# Altium PCB SX1308.PcbDoc
Units mil, origin at the board's own origin, x right, y up, seen from the top; angles counter-clockwise.
Board outline 685 x 570 mil, 2 copper layers (Top Layer, Bottom Layer); 13 components, 7 nets, 30 pads, 24 vias.
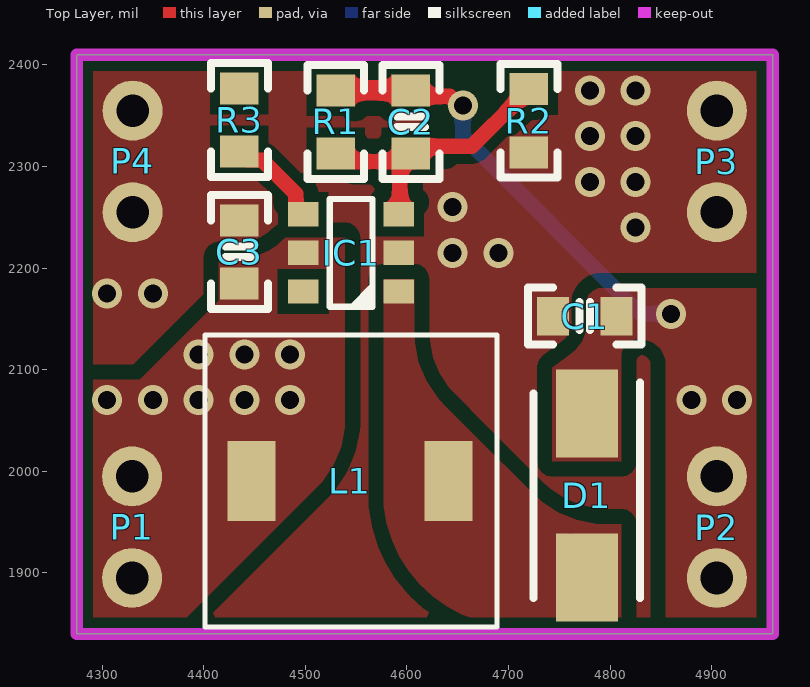
[diagram p0: Top Layer view]
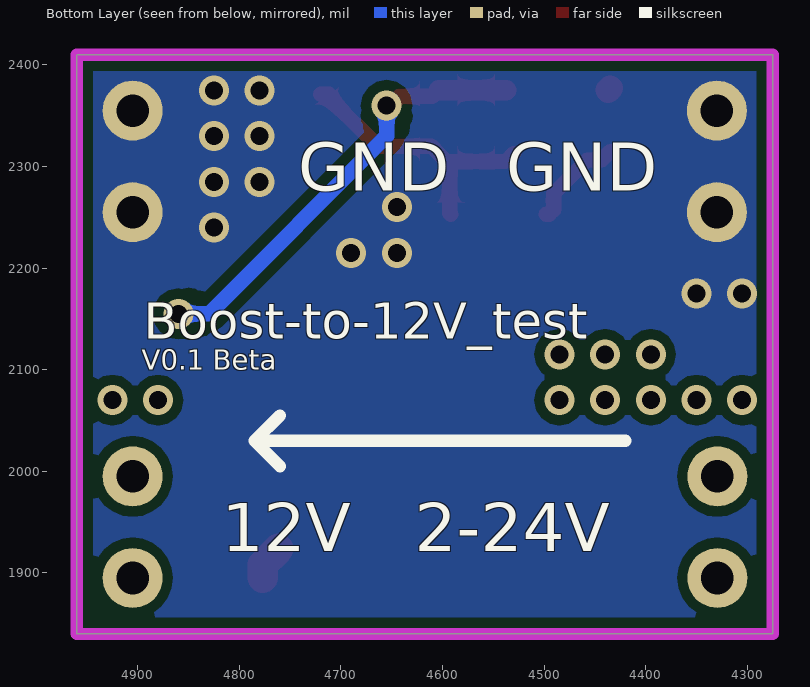
[diagram p1: Bottom Layer view, seen from below]
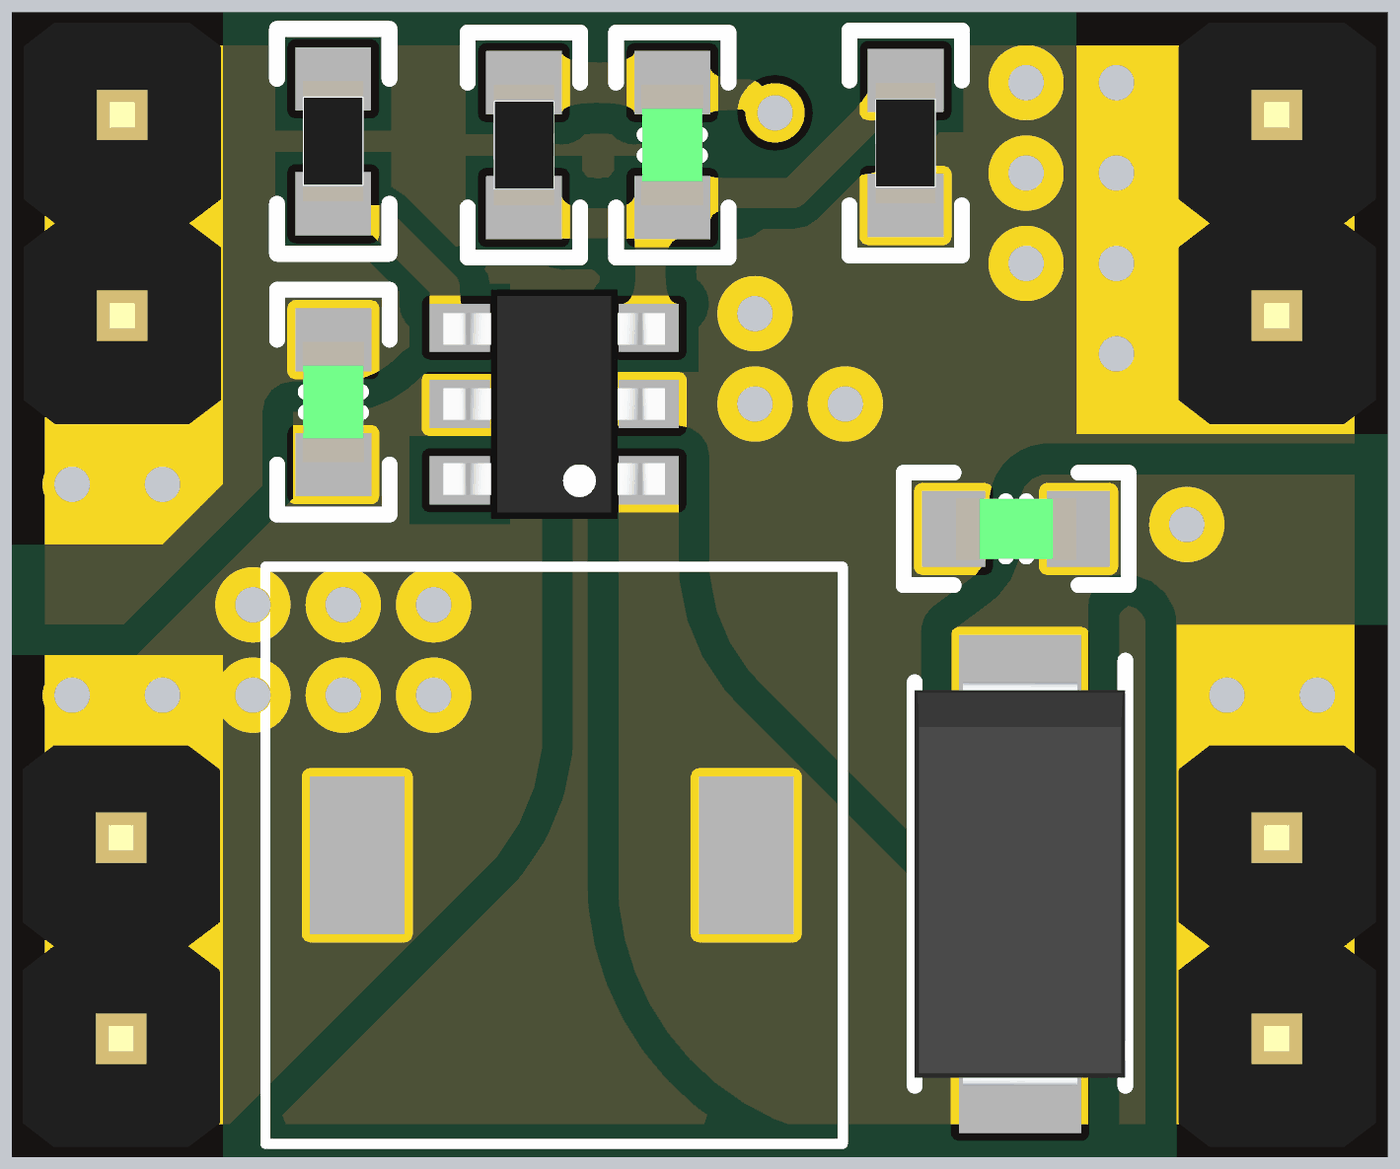
[diagram p2: 3D render of the assembled board from above, using the file's embedded part models]

## Layer stack, top to bottom
Top Solder: solder mask 0.4, Solder Resist, Dk 3.5
Top Layer: signal copper 1.4
Dielectric 1: dielectric 12.6, FR-4, Dk 4.8
Bottom Layer: signal copper 1.4
Bottom Solder: solder mask 0.4, Solder Resist, Dk 3.5

## Board outline
4275,1840 4960,1840 4960,2410 4275,2410

## Design rules (kind name [scope] priority, off if disabled: settings)
Clearance [All] p1: gap=10 ignorepadtopadclearanceinfootprint=FALSE except(15: Fill-Fill Fill-Poly Fill-Region Poly-Poly Poly-Region Region-Region)
PlaneConnect [All] p1: planeconnectstyle=Direct reliefexpansion=20 reliefentries=4 reliefconductorwidth=10 reliefairgap=10
PolygonConnect [All] p1: connectstyle=Direct reliefconductorwidth=10 reliefentries=4 polygonreliefangle="90 Angle" airgapwidth=10
RoutingVias [All] p1: holewidth=17.72 width=29.53 viastyle="Through Hole" minholewidth=17.72 minwidth=29.53 maxholewidth=17.72 maxwidth=29.53
SolderMaskExpansion [All] p1: expansion=4 istentingtop=FALSE
Width [All] p1: maxlimit=100 minlimit=15 preferedwidth=15
29 further rules are at their usual default settings.

## Components (designator, comment, footprint, x,y, rotation, side; value= is the part's Value field where it differs from the comment)
C1 "22uF/25V" CAP-0603 4775,2152.79 r0 top
C2 "15pF/50V" CAP-0603 4603.83,2343.95 r90 top
C3 "22uF/25V" CAP-0603 4435.05,2215.94 r270 top
D1 "SS34" DO-214AC_SMA 4777,1976 r270 top
IC1 "SX1308" SOT-23-6 4545,2215 r0 top locked
L1 "4.7uH/4A" SMD_7.3x7.3x4.2mm 4526.5,1975.71 r0 top
P1 "HDR1x2_2.54" HDR1X2_2.54_180 4329.46,1995 r0 top
P2 "HDR1x2_2.54" HDR1X2_2.54_180 4905,1995 r0 top
P3 "HDR1x2_2.54" HDR1X2_2.54_180 4905,2355 r0 top
P4 "HDR1x2_2.54" HDR1X2_2.54_180 4330,2355 r0 top
R1 "191k" R-0603 4529.95,2343.95 r90 top
R2 "10k" R-0603 4720,2345 r90 top
R3 "100k" R-0603 4435,2345.82 r270 top

## Footprints (in the part's own frame and the unit in brackets; to place one, negate y for a bottom-side part, rotate by r counter-clockwise, add the part's x,y. Pads: shape width x height; smd on the part's side, far side on the other; paste and mask are expansions set on the pad)
CAP-0603 [mm]
  rect 0.8x0.96 smd: 1(-0.79,0) 2(0.79,0)
  silkscreen extent -1.42,-0.71 1.42,0.71, body extent -0.76,-0.39 0.76,0.39, height 0.9
DO-214AC_SMA [mm]
  rect 2.2x1.55 smd: 1(2.05,0) 2(-2.05,0)
  silkscreen extent -2.83,-1.33 2.55,1.33, body extent -2.55,-1.33 2.55,1.33, height 2.29
HDR1X2_2.54_180 [mm]
  round 1.5 hole 0.813: 1(0,0) 2(0,-2.54)
  body extent -1.25,-3.81 1.25,1.27, height 8.2
R-0603 [mm]
  rect 0.8x0.96 smd: 1(-0.79,0) 2(0.79,0)
  silkscreen extent -1.42,-0.71 1.42,0.71, body extent -0.76,-0.38 0.76,0.38, height 0.41
SMD_7.3x7.3x4.2mm [mm]
  rect 1.2x2 smd: 1(-2.02,0.37) 2(2.9,0.37)
  silkscreen extent -3.18,-3.28 4.12,4.02, body extent -3.18,-3.28 4.1,4, height 3
SOT-23-6 [mil]
  rect 30x24 smd: 1(47,-38) 2(47,0) 3(47,38) 4(-47,38) 5(-47,0) 6(-47,-38)
  silkscreen extent -21,-53 21,53, body extent -55,-57 55,57, height 57

## Part data
C1 C3: library part CAP, "X7R", Package=0402, SuppliersPartNumber=C52923, ComponentLink1Description=供应商链接, ComponentLink1URL=http://www.szlcsc.com/product/details_53938.html, Supplier=LC
C2: library part CAP, "NPO", Package=0402, SuppliersPartNumber=C52923, ComponentLink1Description=供应商链接, ComponentLink1URL=http://www.szlcsc.com/product/details_53938.html, Supplier=LC
D1: library part DIODE, "肖特基二极管", Package=SMA(DO-214AC), SuppliersPartNumber=C22452, ComponentLink1Description=供应商链接, ComponentLink1URL=http://www.szlcsc.com/product/details_23178.html, Supplier=LC
IC1: "集成升压芯片", Manufacturer_Name="Shenzhen Suosemi Tech", Datasheet Link=https://datasheet.lcsc.com/szlcsc/Shenzhen-Suosemi-Tech-SX1308_C78162.pdf, Height=1.45mm, Manufacturer_Part_Number=SX1308
L1: library part INDUCTOR, "电感", Package=0402, SuppliersPartNumber=C32041, ComponentLink1Description=供应商链接, ComponentLink1URL=http://www.szlcsc.com/product/details_33003.html, Supplier=LC
P1 P2 P3 P4: "Header"
R1 R2 R3: library part RES, "贴片电阻", Package=0805, SuppliersPartNumber=C17798, Supplier=LC

## Via types
v1: diameter 29.53, hole 17.72, Top Layer to Bottom Layer, 24 vias

## Nets (pads, with @x,y where several pads share a name; then routed paths per layer and width w, separated by ;. In a path a pad name is that pad's centre, name@x,y a point inside that pad or via, vN(x,y) a via of type N, cw(c..) or ccw(c..) an arc to the next point about the centre after c; other vN are vias at no path point)
5V: C3.2 IC1.5 L1.1 P1.1 P1.2
  other v1: 4305,2070 4350,2070 4395,2070 4440,2070 4485,2070 4395,2115 4440,2115 4485,2115
12V: C1.2 C2.2 D1.2 P2.1 P2.2 R1.2 | length 431.8
  Top Layer w15: C2.2 4609.83,2369.05 4642.02,2369.05 4651.07,2360 v1(4655,2360)
  Top Layer w20: R1.2@4536.95,2375.05 C2.2
  Bottom Layer w15: v1(4655,2360) 4655,2330 4830,2155 v1(4860,2155)
  other v1: 4880,2070 4925,2070
GND: C1.1 C3.1 IC1.2 P3.1 P3.2 P4.1 P4.2 R2.1
  other v1: 4305,2175 4350,2175 4645,2215 4690,2215 4825,2240 4645,2260 4780,2285 4825,2285 4780,2330 4825,2330 4780,2375 4825,2375
NetC2_1: C2.1 IC1.3 R1.1 R2.2 | length 272
  Top Layer w15: R1.1 4537.79,2305 4595.99,2305 C2.1 4610.99,2320 4663.9,2320 4708.6,2364.7 4708.6,2367.85 4711.85,2371.1 R2.2@4720,2371.1 ; IC1.3 4593,2254 C2.1@4593,2302.01
NetD1_1: D1.1 IC1.1 L1.2 | length 34.7
  Top Layer w30: D1.1@4761.49,1923.6 4777,1908.09 D1.1
NetIC1_4: IC1.4 R3.2 | length 97.9
  Top Layer w15: R3.2 4443.25,2306.47 4457.53,2306.47 4490.5,2273.5 4490.5,2257.5 4495,2253 IC1.4
NetR3_1: R3.1 | length 2.7
  Top Layer w25: R3.1 R3.1@4436.92,2375
pads on no net: IC1.6

## Polygon pours and split planes (outlines as drawn)
GND on Top Layer "NONET_L01_P-001" (solid, remove dead copper, pour order 11): 4201,2511 4201,1711 5031,1711 5031,2507
NetD1_1 on Top Layer "NONET_L01_P-001" (solid, pour order 10): 4607,2142 4607,2136.42 ccw(c4707,2136.42) 4636.29,2065.71 4665.85,2036.14 4724.71,1977.29 ccw(c4795.42,2048) 4795.42,1948 4811,1948 4811,1848 4713,1848 cw(c4708,1979) 4577,1974 4577,2189 4607,2189
12V on Top Layer "NONET_L01_P-001" (solid, pour order 9): 4854.61,2109.42 4854.61,1840 4960,1840 4960,2180 4791.25,2180 ccw(c4791.25,2165.75) 4777,2165.75 4777,2151.5 cw(c4740.31,2146.2) 4762.37,2116.41 4743,2102.06 4743,2010 4811,2010 4811,2115 cw(c4826,2115) 4826,2130 4830,2130 cw(c4830,2105)
5V on Top Layer "5V_L01_P001" (solid, remove dead copper, pour order 1): 4539,2121 4539,2053.42 cw(c4439,2053.42) 4509.71,1982.71 4368,1841 4276,1841 4276,2090 4337,2090 4415,2168 4415,2211 4439.1,2211 ccw(c4439.1,2263.88) 4476.49,2226.49 4480,2230 4539,2230
5V on Top Solder "NONET_L01_P-001" (solid): 4275,1840 4380,1840 4380,2090 4275,2090
GND on Top Solder "NONET_L01_P-001" (solid): 4275,2410 4275,2145 4350,2145 4380,2175 4380,2410
GND on Top Solder "NONET_L01_P-001" (solid): 4960,2410 4805,2410 4805,2200 4960,2200
12V on Top Solder "NONET_L01_P-001" (solid): 4855,1840 4960,1840 4960,2105 4855,2105
GND on Bottom Layer "NONET_L01_P-001" (solid, remove dead copper, pour order 12): 4200,1708 4200,1711 5035,1711 5035,2511 4198,2511
no net on Bottom Solder "NONET_L01_P-001" (solid): 4855,1840 4960,1840 4960,2105 4855,2105
no net on Bottom Solder "NONET_L01_P-001" (solid): 4960,2410 4805,2410 4805,2200 4960,2200
no net on Bottom Solder "NONET_L01_P-001" (solid): 4275,2410 4275,2145 4350,2145 4380,2175 4380,2410
no net on Bottom Solder "NONET_L01_P-001" (solid): 4275,1840 4380,1840 4380,2090 4275,2090

## Keep-outs
Keep-Out Layer:
  the board outline again, w12

## Silkscreen, mask and mechanical layers (free items; w line width, h text height)
Bottom Overlay:
  lines w12: 4420,2030 4785,2030 ; 4760,2005 4785,2030 ; 4760,2055 4785,2030
  text "GND" at 4537.13,2276.39 h47.24
  text "GND" at 4742.13,2276.39 h47.24
  text "Boost-to-12V_test" at 4894.09,2130.24 h35.43
  text "V0.1 Beta" at 4896.06,2100.16 h19.68
  text "2-24V" at 4627.13,1921.39 h47.24
  text "12V" at 4817.13,1921.39 h47.24
Mechanical 1:
  the board outline again, w12